# Altium PCB CC1201EvalBoard.PcbDoc
Units mil, origin at the board's own origin, x right, y up, seen from the top; angles counter-clockwise.
Board outline 1280 x 1750 mil, 4 copper layers (Top Layer, Layer 2, Layer 3, Bottom Layer), stack 59.5 mil thick; 75 components, 54 nets, 249 pads, 61 vias.
Unrouted connection lines stored in the file: 68.
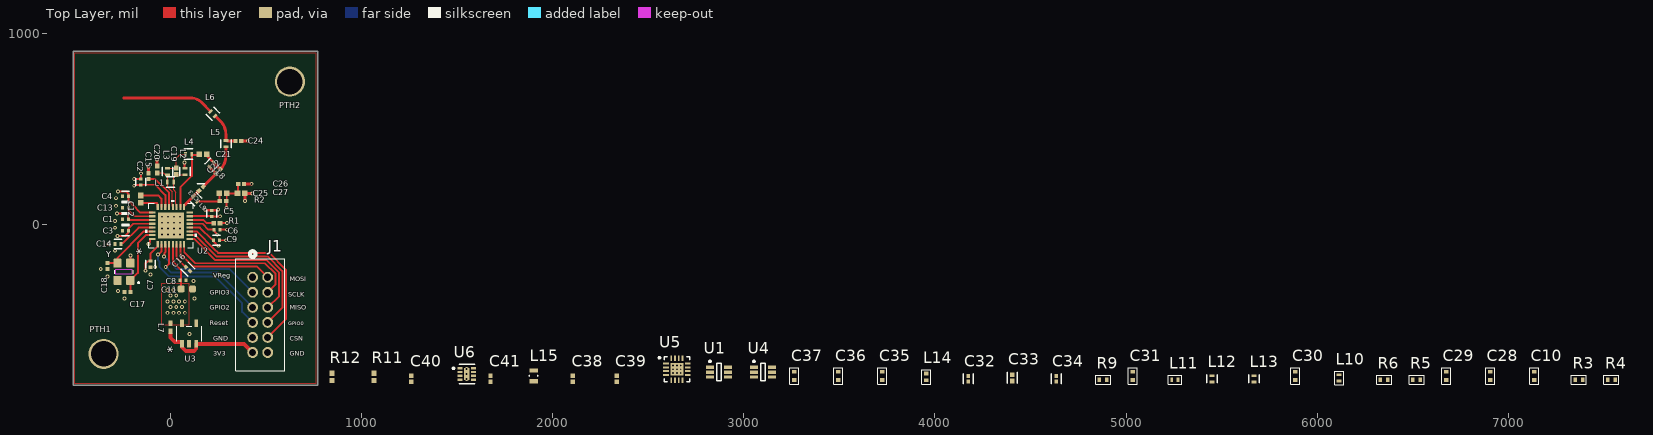
[diagram p0: Top Layer view]
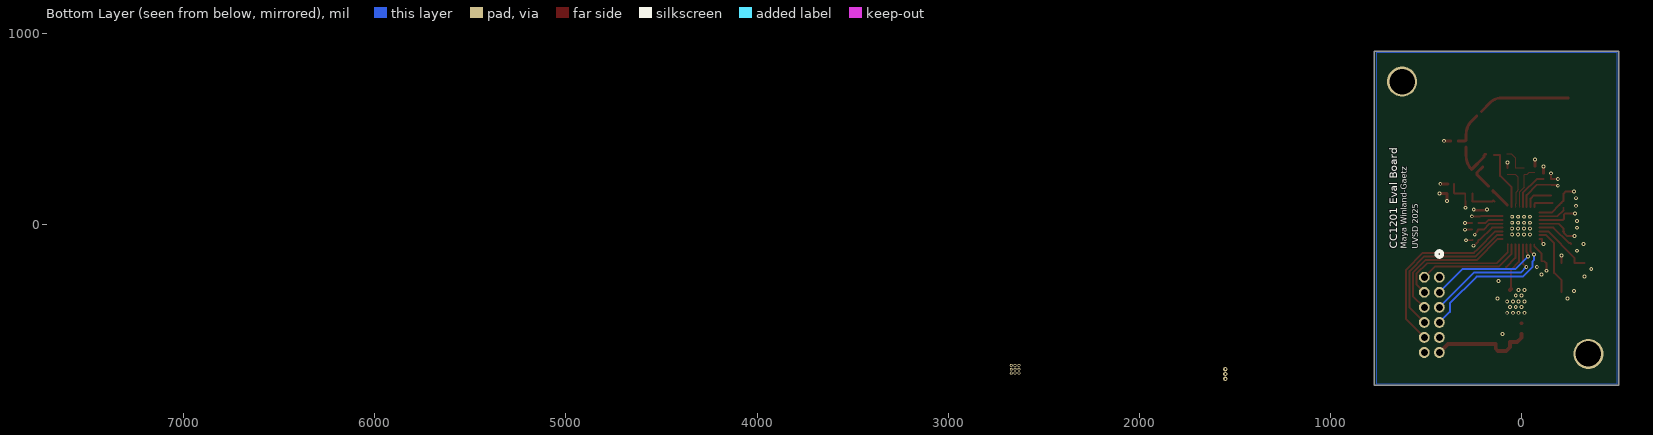
[diagram p1: Bottom Layer view, seen from below]
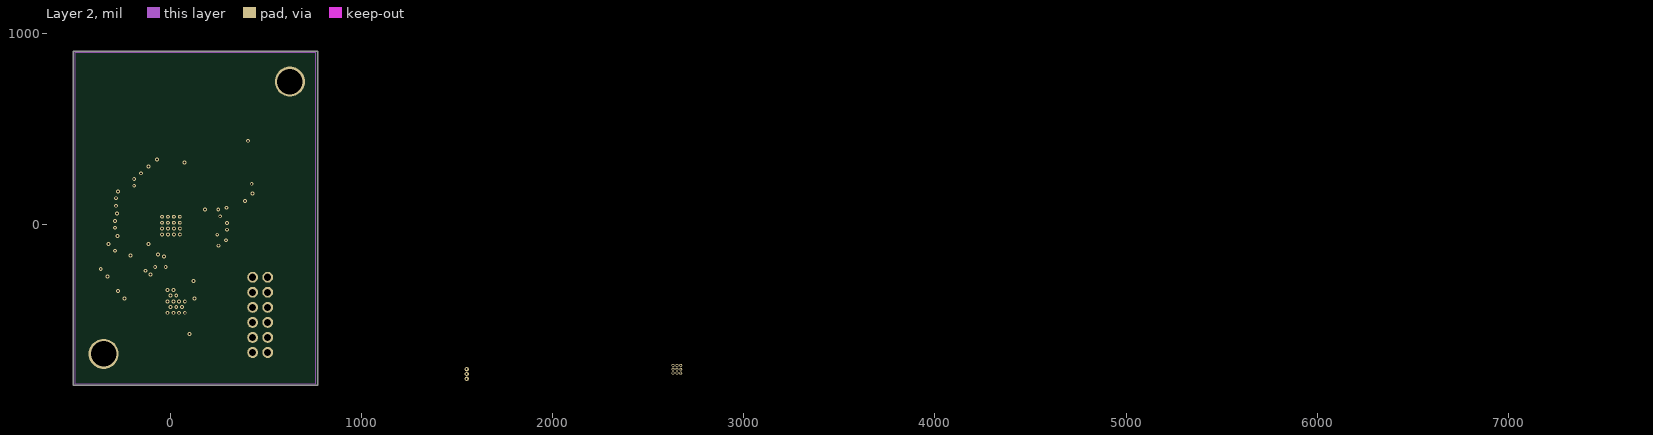
[diagram p2: Layer 2]
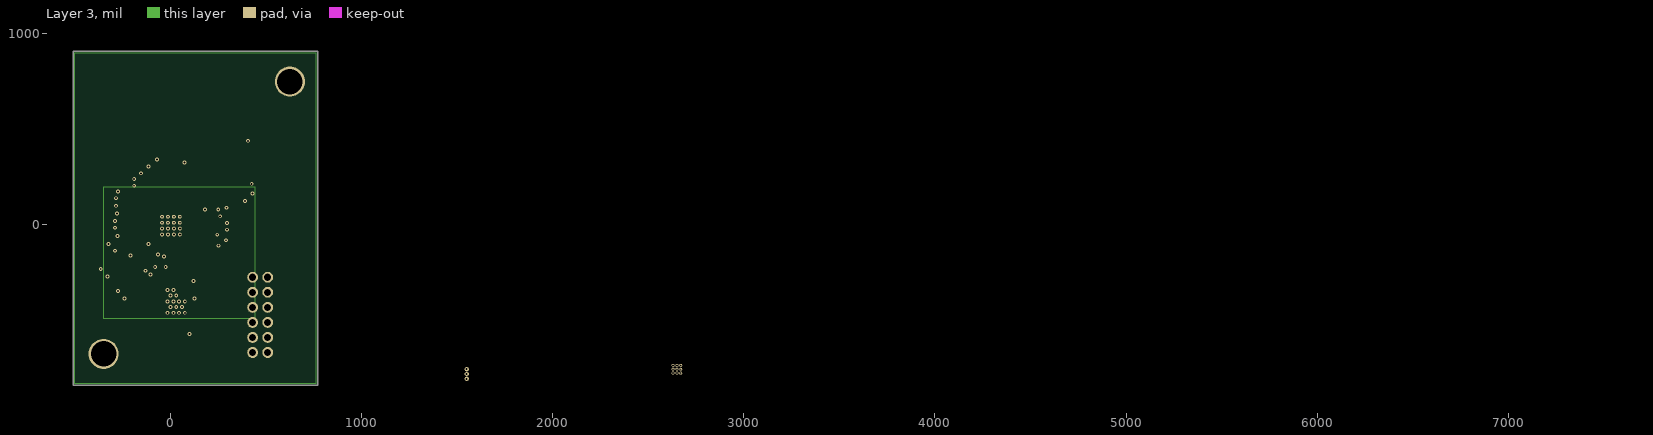
[diagram p3: Layer 3]

## Layer stack, top to bottom
Top Solder: solder mask 0.6, Solder Resist, Dk 3.5
Top Layer: signal copper 1.7
Dielectric 1: prepreg 7.87, FR-4, Dk 3.61
Layer 2: signal copper 0.68
Core: core 39, FR-4, Dk 3.61
Layer 3: signal copper 0.68
Dielectric 2: prepreg 7.87, FR-4, Dk 3.61
Bottom Layer: signal copper 1.7
Board Layer Stack Bottom Solder: solder mask 0.6, Solder Resist, Dk 3.5

## Board outline
-510,910 770,910 770,-840 -510,-840

## Design rules (kind name [scope] priority, off if disabled: settings)
AssemblyTestPointUsage [All] p1: isadvanced=TRUE
AssemblyTestpoint [All] p1: isadvanced=TRUE testpointundercomponent=TRUE minsize=40 maxsize=100 preferedsize=60 minholesize=0 maxholesize=40 preferedholesize=32 testpointgrid=1 usegrid=TRUE gridoriginx=3045 gridoriginy=3310 gridtolerance=0.01 allowsidetop=TRUE allowsidebottom=TRUE
BoardOutlineClearance [All] p1: gap=15 ignorepadtopadclearanceinfootprint=FALSE except(0: Poly-OutlineEdge Poly-CavityEdge Poly-CutoutEdge Poly-SplitBarrior Poly-SplitContinuation)
Clearance 80R_To_GND [InNetClass('80R') vs InPolygon] p1: gap=16 ignorepadtopadclearanceinfootprint=FALSE
Clearance 50R_To_GND [InNetClass('50R') vs InPolygon] p2: gap=25 ignorepadtopadclearanceinfootprint=FALSE except(15: SMDPad-Poly; 16: Arc-Arc Arc-Track Track-Track)
Clearance Clearance_1 [(ExistsOnLayer('Layer 2') Or ExistsOnLayer('Layer 3')) vs (ExistsOnLayer('Layer 2') Or ExistsOnLayer('Layer 3'))] p3: gap=7.87 ignorepadtopadclearanceinfootprint=FALSE sourcerule=54 cellrowname=All cellrowtype=0 cellcolname=All cellcoltype=0 innerlayers=TRUE
Clearance Clearance_2 [(ExistsOnLayer('Top Layer') Or ExistsOnLayer('Bottom Layer')) vs (ExistsOnLayer('Top Layer') Or ExistsOnLayer('Bottom Layer'))] p4: gap=7.87 ignorepadtopadclearanceinfootprint=FALSE sourcerule=54 cellrowname=All cellrowtype=0 cellcolname=All cellcoltype=0 outerlayers=TRUE
Clearance [All] p5: gap=10 ignorepadtopadclearanceinfootprint=FALSE ismatrix=TRUE
ComponentClearance [All] p1: isadvanced=TRUE gap=10 collisioncheckmode=3 verticalgap=10 showdistances=FALSE
FabricationTestPointUsage [All] p1: isadvanced=TRUE valid=0 allowmultiple=FALSE
FabricationTestpoint [All] p1: isadvanced=TRUE side=3 testpointundercomponent=TRUE minsize=40 maxsize=100 preferedsize=60 minholesize=0 maxholesize=40 preferedholesize=32 testpointgrid=1 allowsidetop=TRUE allowsidebottom=TRUE usegrid=TRUE gridoriginx=3045 gridoriginy=3310 gridtolerance=0.01
FanoutControl Fanout_BGA [IsBGA] p1: isadvanced=TRUE bgadir=Out bgaviamode=Centered fanoutstyle=Auto fanoutdirection=Alternating viagrid=1 // Fanout_BGA (Default Rule)
FanoutControl Fanout_LCC [IsLCC] p2: isadvanced=TRUE bgadir=Out bgaviamode=Centered fanoutstyle=Auto fanoutdirection=Alternating viagrid=1 // Fanout_LCC (Default Rule)
FanoutControl Fanout_SOIC [IsSOIC] p3: isadvanced=TRUE bgadir=Out bgaviamode=Centered fanoutstyle=Auto fanoutdirection=Alternating viagrid=1 // Fanout_SOIC (Default Rule)
FanoutControl Fanout_Small [(CompPinCount < 5)] p4: isadvanced=TRUE bgadir=Out bgaviamode=Centered fanoutstyle=Auto fanoutdirection=OutThenIn viagrid=1 // Fanout_Small (Default Rule)
FanoutControl Fanout_Default [All] p5: isadvanced=TRUE bgadir=Out bgaviamode=Centered fanoutstyle=Auto fanoutdirection=Alternating viagrid=1 // Fanout_Default (Default Rule)
Height [All] p1: isadvanced=TRUE minheight=0 maxheight=1000 prefheight=500
HoleSize [All] p1: isadvanced=TRUE absolutevalues=TRUE maxlimit=100 minlimit=1 maxpercent=80.000 minpercent=20.000
HoleToHoleClearance [All] p1: isadvanced=TRUE gap=0 allowstackedmicrovias=TRUE
LayerPairs [All] p1: isadvanced=TRUE enforce=TRUE
MaxMinImpedance MaxMinImpedance_1 [InNet('NetJ4_1')] p1: minimum=49.00 maximum=51.00
MinimumSolderMaskSliver [All] p1: isadvanced=TRUE minsoldermaskwidth=4
NetAntennae [All] p1: isadvanced=TRUE netantennaetolerance=0
PasteMaskExpansion [All] p1: isadvanced=TRUE expansion=0
PlaneClearance PlaneClearance_1 [All] p1: clearance=16
PlaneClearance [All] p2: isadvanced=TRUE clearance=20
PlaneConnect [All] p1: isadvanced=TRUE planeconnectstyle=Relief reliefexpansion=20 reliefentries=4 reliefconductorwidth=10 reliefairgap=10
PolygonConnect "CC1201 Stitching" [InNet('GND') vs (IsVia OR IsPad AND InComponent('U2'))] p1: connectstyle=Direct reliefconductorwidth=10 reliefentries=4 polygonreliefangle="90 Angle" airgapwidth=10
PolygonConnect "Via Stitchings" [(InNamedUnion('Via Stitchings'))] p2: connectstyle=Direct reliefconductorwidth=10 reliefentries=4 polygonreliefangle="90 Angle" airgapwidth=10
PolygonConnect "Power Plane Connections" [(OnLayer('Layer 3')) vs IsVia] p3: connectstyle=Direct reliefconductorwidth=10 reliefentries=4 polygonreliefangle="90 Angle" airgapwidth=10
PolygonConnect "Mounting Holes" [(InComponent('PTH1') OR InComponent('PTH2'))] p4: connectstyle=Direct reliefconductorwidth=10 reliefentries=4 polygonreliefangle="90 Angle" airgapwidth=10
PolygonConnect [All] p5: connectstyle=Relief reliefconductorwidth=10 reliefentries=4 polygonreliefangle="90 Angle" airgapwidth=10
RoutingCorners RF [(InNetClass('50R') OR InNetClass('80R'))] p1: cornerstyle=Round minsetback=100 maxsetback=100
RoutingCorners [All] p2: isadvanced=TRUE cornerstyle=45-Degree minsetback=100 maxsetback=100
RoutingPriority [All] p1: isadvanced=TRUE routingpriority=0
RoutingVias [All] p1: holewidth=28 width=50 viastyle="Through Hole" minholewidth=28 minwidth=50 maxholewidth=28 maxwidth=50
ShortCircuit [All] p1: isadvanced=TRUE allowed=FALSE
SilkToSilkClearance [All] p1: isadvanced=TRUE silktosilkclearance=10
SilkToSolderMaskClearance [IsPad] p1: isadvanced=TRUE minsilkscreentomaskgap=5 clearancetoexposedcopper=TRUE
SolderMaskExpansion [All] p1: isadvanced=TRUE expansion=4 istentingtop=FALSE
SupplyNets "Schematic Supply Nets_5" [InNet('GND')] p1: voltage=0.000
SupplyNets "Schematic Supply Nets_4" [InNet('3V3A')] p2: voltage=0.000
SupplyNets "Schematic Supply Nets_3" [InNet('VDD_REG')] p3: voltage=0.000
UnRoutedNet [All] p1: isadvanced=TRUE
UnpouredPolygon [All] p1: isadvanced=TRUE
Width "Schematic Width Constraint" [InNetClass('RF_Main_Line')] p1: maxlimit=15.05 minlimit=8.87 preferedwidth=15.05 toplayer_minwidth=15.05 midlayer1_maxwidth=8.87 midlayer1_prefwidth=8.87 midlayer2_maxwidth=8.87 midlayer2_prefwidth=8.87 bottomlayer_minwidth=15.05 impedanceprofiledriven=TRUE impedanceprofileid={50AE215A-F4A0-4E25-9E06-91FD44022372} impedanceprofilevalue=50.000000 minimp=50.000000 maximp=50.000000 favimp=50.000000
Width 50_Ohm [InNetClass('50R')] p2: maxlimit=15.05 minlimit=8.87 preferedwidth=15.05 toplayer_minwidth=15.05 midlayer1_maxwidth=8.87 midlayer1_prefwidth=8.87 midlayer2_maxwidth=8.87 midlayer2_prefwidth=8.87 bottomlayer_minwidth=15.05 impedanceprofiledriven=TRUE impedanceprofileid={50AE215A-F4A0-4E25-9E06-91FD44022372} impedanceprofilevalue=50.000000 minimp=50.000000 maximp=50.000000 favimp=50.000000
Width 80_Ohm [InNetClass('80R')] p3: maxlimit=5.17 minlimit=2 preferedwidth=5.17 toplayer_minwidth=5.17 midlayer1_maxwidth=2 midlayer1_prefwidth=2 midlayer2_maxwidth=2 midlayer2_prefwidth=2 bottomlayer_minwidth=5.17 impedanceprofiledriven=TRUE impedanceprofileid={4277FD1D-45B3-40C1-A296-8DB108E2D102} impedanceprofilevalue=80.000000 minimp=50.000000 maximp=50.000000 favimp=50.000000
Width VDD [InNetClass('VDD')] p4: maxlimit=20.2 minlimit=10 preferedwidth=10 minimp=50.000000 maximp=50.000000 favimp=50.000000
Width MaxMinWidth_4 [InNetClass('ZMatch')] p5: maxlimit=15.05 minlimit=8.87 preferedwidth=15.05 toplayer_minwidth=15.05 midlayer1_maxwidth=8.87 midlayer1_prefwidth=8.87 midlayer2_maxwidth=8.87 midlayer2_prefwidth=8.87 bottomlayer_minwidth=15.05 impedanceprofiledriven=TRUE impedanceprofileid={50AE215A-F4A0-4E25-9E06-91FD44022372} impedanceprofilevalue=50.000000 minimp=50.000000 maximp=50.000000 favimp=50.000000
Width [All] p6: maxlimit=10 minlimit=10 preferedwidth=10
4 further rules are at their usual default settings.

## Classes and differential pairs
net class RF_Main_Line: GND NetC30_1 NetC30_2 NetC31_1 NetC31_2 NetC33_1 NetC34_1 NetC35_1 NetC37_1
net class VDD: 3V3A NetU3_4 VDD_REG
net class 80R: LNA_N LNA_P NetC19_1
net class 50R: NetC10_1 NetC21_2 NetC22_1 NetC24_2 NetC37_1 NetC40_1 NetC40_2 NetC41_2 PA RF_TxRx

## Components (designator, comment, footprint, x,y, rotation, side; value= is the part's Value field where it differs from the comment)
C1 "GRM155R71E473KA88D" FP-GRM155-0_05-MFG -235,30 r180 top
C2 "GRM155R71E473KA88D" FP-GRM155-0_05-MFG -155,225 r90 top
C3 "GRM155R71E473KA88D" FP-GRM155-0_05-MFG -235,-30 r180 top
C4 "GRM155R71E473KA88D" FP-GRM155-0_05-MFG -235,150 r180 top
C5 "GRM155R71E473KA88D" FP-GRM155-0_05-MFG 216,61 r90 top
C6 "GRM155R71E473KA88D" FP-GRM155-0_05-MFG 244.25,-25 r0 top
C7 "GRM155R71E473KA88D" FP-GRM155-0_05-MFG -105,-205.75 r270 top
C8 "GRM155R71E473KA88D" FP-GRM155-0_05-MFG 65,-290 r0 top
C9 "GRM155R71E473KA88D" FP-GRM155-0_05-MFG 240,-80 r0 top
C10 "GRM155R71C104KA88D" MURATA_C0402 7135,-790 r90 top value=0.10μF
C11 "GRT188R61A225KE13D" CAPC1608X9N 85.47,-335 r0 top
C12 "GRM1557U1A152JA01D" CAPC1005X55X25ML05T10 -155,135 r270 top
C13 "GRM155R71E473KA88D" FP-GRM155-0_05-MFG -235,90 r180 top
C14 "GRM155R71E473KA88D" FP-GRM155-0_05-MFG -275,-100 r180 top
C15 "GRM155R71E103KA01D" CAPC1005X55X25LL05T10 -115,255 r270 top
C16 "GRM155R61A224KE19D" FP-GRM155-0_05-IPC_C 91.08,-231.08 r315 top
C17 "GRM1555C1H150JA01D" CAPC1005X55X25LL05T10 -225,-350 r0 top
C18 "GRM1555C1H150JA01D" CAPC1005X55X25LL05T10 -330,-214.65 r90 top
C19 "GRM1555C1H3R3CA01D" CAPC1005X55X25NL5T10 30,280 r270 top
C20 "GRM1555C1H3R3CA01D" CAPC1005X55X25NL5T10 -70,290 r270 top
C21 "GRM1555C1H2R2CA01D" CAPC1005X55X25ML05T10 170,370 r0 top value=2.2p
C22 "GRM1555C1H1R0BA01D" CAPC1005X55X25LL05T10 250,280 r45 top
C23 "GRM1555C1H150JA01D" CAPC1005X55X25LL05T10 160,190 r45 top
C24 "GRM1555C1H3R0CA01D" CAPC1005X55X25LL05T10 355,440 r180 top value=3pF
C25 "GRM1555C1H330JA01D" CAPC1005X55X25ML05T10 275,165 r180 top
C26 "GRM155R71E103KA01D" CAPC1005X55X25LL05T10 370,215 r180 top
C27 "GRM1555C1H101JA01D" CAPC1005X55X25ML05T10 370,165 r180 top
C28 "GRM155R71C104KA88D" MURATA_C0402 6905,-790 r90 top value=0.10μF
C29 "GRM1555C1H101JA01D" MURATA_C0402 6675,-790 r90 top
C30 "GRM1555C1H101JA01D" MURATA_C0402 5885,-790 r90 top
C31 "GRM155R70G105KA12D" MURATA_C0402 5035,-790 r90 top
C32 "GJM1555C1H3R9CB01D" FP-GJM155-0_05-IPC_C 4175,-805 r90 top
C33 "GJM1555C1H6R8WB01D" FP-GJM155-0_05-IPC_B 4405,-800 r90 top
C34 "GJM1555C1H3R9CB01D" FP-GJM155-0_05-IPC_C 4635,-805 r90 top
C35 "GJM1555C1HR30WB01D" MURATA_C0402 3725,-790 r90 top
C36 "GJM1555C1H4R7CB01D" MURATA_C0402 3495,-790 r90 top
C37 "GJM1555C1H1R5BB01D" MURATA_C0402 3265,-790 r90 top
C38 "1uF" CAPC1005X56X25LL10T15 2105,-805 r90 top
C39 "100pF" CAPC1005X56X25LL10T15 2335,-805 r90 top
C40 "4.7pF" CAPC1005X56X25LL10T15 1260,-805 r90 top
C41 "100pF" CAPC1005X56X25LL10T15 1675,-805 r90 top
J1 "PPTC062LFBN-RC" CONN12_878311241_MOL 430,-273.78 r270 top
L1 "LQW15AN15NJ00D" FP-LQW15AN_00-W0_6-0_1-MFG#1 0,225 r180 top
L2 "LQW15AN12NJ00D" FP-LQW15AN_00-W0_6-0_1-MFG#1 75,280 r270 top value=12nH
L3 "LQW15AN12NJ00D" FP-LQW15AN_00-W0_6-0_1-MFG#1 -15,280 r90 top value=12nH
L4 "LQW15AN12NJ00D" FP-LQW15AN_00-W0_6-0_1-MFG#1 95,370 r180 top value=12nH
L5 "LQW15AN18NJ00D" FP-LQW15AN_00-W0_6-0_1-MFG#1 290,425 r90 top
L6 "LQW15AN12NJ00D" FP-LQW15AN_00-W0_6-0_1-MFG#1 222,582 r135 top value=12nH
L7 "BLM15HG102SN1D" "IND_BLM15_0402_MUR - NO_KEEPOUT" 0,-535 r270 top
L8 "LQW15AN7N5G00D" FP-LQW15AN_00-W0_6-0_1-MFG#1 215,315 r45 top
L9 "LQW15AN10NJ00D" FP-LQW15AN_00-W0_6-0_1-MFG#1 130,135 r135 top
L10 "LQW15AN18NJ00D" MURATA_L0402_LQW 6115,-800 r90 top
L11 "LQW15AN3N6C10D" MURATA_L0402_LQW 5255,-810 r0 top
L12 "LQW15AN12NG00D" FP-LQW15AN_00-W0_6-0_1-MFG#2 5450,-805 r90 top
L13 "LQW15AN12NG00D" FP-LQW15AN_00-W0_6-0_1-MFG#2 5670,-805 r90 top
L14 "LQP15MN8N2B02D" MURATA_L0402_LQP 3955,-795 r90 top
L15 "12nH" FP-LQW18AN_80-MFG 1900,-790 r90 top
PTH1 "PTH" "M3 Mounting Hole" -350,-675 r0 top
PTH2 "PTH" "M3 Mounting Hole" 625,750 r0 top
R1 "RK73H1ETTP5602F" RESC1005X40X25NL10T10 243.27,10 r0 top
R2 "RC0402JR-0710RL" RESC1005X40X25NL05T10 275,125 r180 top
R3 "RC0402FR-07300RL" Yageo_0402 7370,-810 r0 top
R4 "RC0402JR-130RL" Yageo_0402 7540,-810 r0 top
R5 "RC0402FR-07130RL" Yageo_0402 6520,-810 r0 top
R6 "AC0402FR-07820RL" Yageo_0402 6350,-810 r0 top
R9 "RC0402FR-077R5L" Yageo_0402 4880,-810 r0 top
R11 "33k" RESC1005X40X25ML05T10 1065,-795 r90 top
R12 "10k" RESC1005X40X25ML05T10 845,-795 r90 top
U1 "4259-63" PERE-SC-70-6_M 2870,-770 r0 top
U2 "CC1201RHBR" RHB32_3P45X3P45_TEX 2.44,-3.91 r90 top
U3 "TPS79330DBVR" DBV5_TEX 97.6,-568.75 r90 top
U4 "4259-63" PERE-SC-70-6_M 3100,-770 r0 top
U5 "GRF5511" QFN50P300X300X100_HS-17N 2650,-755 r0 top
U6 "TQP3M9036" FP-TQP3M9036-MFG 1550,-780 r0 top
Y "NX3225SA-40M-EXS00A-CS03880" OSCCC320X250X60 -243.46,-245.28 r180 top

## Footprints (in the part's own frame and the unit in brackets; to place one, negate y for a bottom-side part, rotate by r counter-clockwise, add the part's x,y. Pads: shape width x height; smd on the part's side, far side on the other; paste and mask are expansions set on the pad)
CAPC1005X55X25LL05T10 [mm] "Chip Capacitor, 2-Leads, Body 1.00x0.50mm, IPC High Density"
  rect 0.56x0.52 smd mask+0.025: 1(-0.39,0) 2(0.39,0)
  body extent -0.53,-0.28 0.53,0.28, height 0.55
CAPC1005X55X25ML05T10 [mm] "Chip Capacitor, 2-Leads, Body 1.00x0.50mm, IPC Low Density"
  rect 0.76x0.72 smd mask+0.025: 1(-0.49,0) 2(0.49,0)
  body extent -0.53,-0.28 0.53,0.27, height 0.55
CAPC1005X55X25NL5T10 [mm] "Chip Capacitor, 2-Leads, Body 1.05x0.55mm, IPC Medium Density"
  rect 0.66x0.62 smd mask+0.025: 1(-0.44,0) 2(0.44,0)
  body extent -0.53,-0.28 0.53,0.28, height 0.55
CAPC1005X56X25LL10T15 [mm] "Chip Capacitor, 2-Leads, Body 1.00x0.50mm, IPC High Density"
  rect 0.58x0.54 smd: 1(-0.39,0) 2(0.39,0)
  body extent -0.55,-0.3 0.55,0.3, height 0.56
CAPC1608X9N [mm]
  rrect50% 0.93x0.93 smd mask+0.025: 1(-0.75,0) 2(0.75,0)
CONN12_878311241_MOL [mil]
  round 57 hole 37 paste-99999 mask+1: 1(0,0) 2(0,78.74) 3(78.74,0) 4(78.74,78.74) 5(157.48,0) 6(157.48,78.74) 7(236.22,0) 8(236.22,78.74) 9(314.96,0) 10(314.96,78.74) 11(393.7,0) 12(393.7,78.74)
  silkscreen extent -137,-90 490,168
DBV5_TEX [mil]
  rect 38.5x20 smd paste+0 mask+1: 1(-53.75,37.4) 2(-53.75,0) 3(-53.75,-37.4) 4(53.75,-37.4) 5(53.75,37.4)
  silkscreen extent -40,-65 40,65, body extent -59,-60 59,60, height 57
FP-GJM155-0_05-IPC_B [mil]
  rect 24.23x22.54 smd paste+0 mask+0: 1(-16.87,0) 2(16.87,0)
  silkscreen extent -29,-27 29,27, body extent -35,-17 35,17, height 10
FP-GJM155-0_05-IPC_C [mil]
  rect 20.29x18.6 smd paste+0 mask+0: 1(-14.9,0) 2(14.9,0)
  silkscreen extent -25,-27 25,27, body extent -29,-15 29,15, height 10
FP-GRM155-0_05-IPC_C [mil]
  rect 20.29x18.6 smd paste+0 mask+1: 1(-14.9,0) 2(14.9,0)
  silkscreen extent -25,-27 25,27, body extent -29,-15 29,15, height 10
FP-GRM155-0_05-MFG [mm]
  rect 0.4x0.5 smd paste+0 mask+0.025: 1(-0.4,0) 2(0.4,0)
  silkscreen extent -0.5,-0.65 0.5,0.65, body extent -0.7,-0.38 0.7,0.38, height 0.25
FP-LQW15AN_00-W0_6-0_1-MFG#1 [mm]
  rect 0.35x0.65 smd paste+0 mask+0.025: 1(-0.425,0) 2(0.425,0)
  silkscreen extent -0.55,-0.7 0.55,0.7, body extent -0.7,-0.45 0.7,0.45, height 0.25
FP-LQW15AN_00-W0_6-0_1-MFG#2 [mm]
  rect 0.35x0.65 smd paste+0 mask+0: 1(-0.425,0) 2(0.425,0)
  silkscreen extent -0.55,-0.7 0.55,0.7, body extent -0.7,-0.45 0.7,0.45, height 0.25
FP-LQW18AN_80-MFG [mm]
  rect 0.57x1.15 smd paste+0 mask+0: 1(-0.715,0) 2(0.715,0)
  silkscreen extent -0.06,-0.55 0.06,0.55, body extent -1.1,-0.67 1.1,0.67, height 0.25
FP-TQP3M9036-MFG [mm]
  rect 0.67x0.3 smd paste+0 mask+0: 1(-0.885,0.75) 2(-0.885,0.25) 3(-0.885,-0.25) 4(-0.885,-0.75) 5(0.885,-0.75) 6(0.885,-0.25) 7(0.885,0.25) 8(0.885,0.75)
  rect 0.7x1.6 smd paste+0 mask+0: 9(0,0)
  silkscreen extent -1.87,-1.3 1.05,1.3, body extent -1.32,-1.12 1.32,1.12, height 0.25
"IND_BLM15_0402_MUR - NO_KEEPOUT" [mil]
  rect 28x22 smd paste+0 mask+1: 1(-20.5,0) 2(20.5,0)
  body extent -21,-11 21,11, height 22
"M3 Mounting Hole" [mm]
  round 4 hole 3.4: 1(0,0)
MURATA_C0402 [mm] "Murata mid-voltage MLCC 0402 footprint, medium density courtyard, origin at centre. Series GRM, GJM /  / Datasheet: (GRM1555C1H101JA01) https://search.murata.co.jp/Ceramy/image/img/A01X/G101/ENG/GRM1555C1H101JA01-01A.pdf"
  rect 0.5x0.6 smd: 1(-0.55,0) 2(0.55,0)
  silkscreen extent -1.1,-0.6 1.1,0.6, body extent -0.5,-0.25 0.5,0.25, height 0.56
MURATA_L0402_LQP [mm] "Murata mid-voltage inductor 0402 footprint, medium density courtyard, origin at centre. Series LQW /  / Datasheet: https://search.murata.co.jp/Ceramy/image/img/P02/JELF243A-0050.pdf"
  rect 0.5x0.6 smd: 1(-0.45,0) 2(0.45,0)
  silkscreen extent -0.97,-0.6 0.98,0.6, body extent -0.55,-0.31 0.55,0.31, height 0.46
MURATA_L0402_LQW [mm] "Murata mid-voltage inductor 0402 footprint, medium density courtyard, origin at centre. Series LQW /  / Datasheet: https://search.murata.co.jp/Ceramy/image/img/P02/JELF243A-0050.pdf"
  rect 0.35x0.65 smd: 1(-0.425,0) 2(0.425,0)
  silkscreen extent -0.9,-0.6 0.9,0.6, body extent -0.5,-0.3 0.5,0.3, height 0.6
OSCCC320X250X60 [mm]
  rrect25% 1.11x1.21 smd mask+0.025: 1(-0.85,1.15) 2(-0.85,-1.15) 3(0.85,-1.15) 4(0.85,1.15)
  silkscreen extent -2.05,-0.23 1.25,1.55
PERE-SC-70-6_M [mm] "SOT23, 6-Leads, Body 2.25x1.35mm, Pitch 0.65mm, IPC Low Density"
  rect 1.05x0.45 smd: 1(-1.2,0.65) 2(-1.2,0) 3(-1.2,-0.65) 4(1.2,-0.65) 5(1.2,0) 6(1.2,0.65)
  silkscreen extent -1.32,-1.15 0.3,1.55, body extent -0.67,-1.12 0.67,1.13, height 1.1
QFN50P300X300X100_HS-17N [mm]
  rect 0.75x0.25 smd: 1(-1.45,0.75) 2(-1.45,0.25) 3(-1.45,-0.25) 4(-1.45,-0.75) 9(1.45,-0.75) 10(1.45,-0.25) 11(1.45,0.25) 12(1.45,0.75)
  rect 0.25x0.75 smd: 5(-0.75,-1.45) 6(-0.25,-1.45) 7(0.25,-1.45) 8(0.75,-1.45) 13(0.75,1.45) 14(0.25,1.45) 15(-0.25,1.45) 16(-0.75,1.45)
  round 0.4 hole 0.256: 17(-0.508,-0.508) 17(-0.508,0) 17(-0.508,0.508) 17(0,-0.508) 17(0,0) 17(0,0.508) 17(0.508,-0.508) 17(0.508,0) 17(0.508,0.508)
  rect 1.7x1.7 smd: 17(0,0)
  silkscreen extent -2.45,-1.68 1.68,1.68, body extent -1.53,-1.53 1.53,1.53, height 1
RESC1005X40X25ML05T10 [mm] "Chip Resistor, 2-Leads, Body 1.00x0.50mm, IPC Low Density"
  rect 0.7x0.65 smd: 1(-0.475,0) 2(0.475,0)
  body extent -0.53,-0.27 0.53,0.28, height 0.4
RESC1005X40X25NL05T10 [mm] "Chip Resistor, 2-Leads, Body 1.00x0.50mm, IPC Medium Density"
  rect 0.6x0.55 smd mask+0.025: 1(-0.425,0) 2(0.425,0)
  body extent -0.53,-0.27 0.53,0.28, height 0.4
RESC1005X40X25NL10T10 [mm] "Chip Resistor, 2-Leads, Body 1.00x0.50mm, IPC Medium Density"
  rect 0.65x0.6 smd mask+0.025: 1(-0.425,0) 2(0.425,0)
  body extent -0.55,-0.3 0.55,0.3, height 0.4
RHB32_3P45X3P45_TEX [mil]
  rect 33.46x11.02 smd paste-16.23 mask+1: 1(-97.44,68.9) 2(-97.44,49.21) 3(-97.44,29.53) 4(-97.44,9.84) 5(-97.44,-9.84) 6(-97.44,-29.53) 7(-97.44,-49.21) 8(-97.44,-68.9) 17(97.44,-68.9) 18(97.44,-49.21) 19(97.44,-29.53) 20(97.44,-9.84) 21(97.44,9.84) 22(97.44,29.53) 23(97.44,49.21) 24(97.44,68.9)
  rect 11.02x33.46 smd paste-16.23 mask+1: 9(-68.91,-97.44) 10(-49.22,-97.44) 11(-29.53,-97.44) 12(-9.85,-97.44) 13(9.84,-97.44) 14(29.53,-97.44) 15(49.22,-97.44) 16(68.91,-97.44) 25(68.91,97.44) 26(49.22,97.44) 27(29.53,97.44) 28(9.84,97.44) 29(-9.85,97.44) 30(-29.53,97.44) 31(-49.22,97.44) 32(-68.91,97.44)
  rect 135.83x135.83 smd paste-67.41 mask+1: 33(0,0)
  round 20 hole 10 paste-99999 mask+1: V(-46.5,-46.5) V(-46.5,-15.5) V(-46.5,15.5) V(-46.5,46.5) V(-15.5,46.5) V(-15.5,15.5) V(-15.5,-15.5) V(-15.5,-46.5) V(15.5,46.5) V(15.5,15.5) V(15.5,-15.5) V(15.5,-46.5) V(46.5,-46.5) V(46.5,-15.5) V(46.5,15.5) V(46.5,46.5)
  silkscreen extent -116,-134 134,134, body extent -103,-103 103,103, height 55
Yageo_0402 [mm] "Standard 0402 footprint for Yageo Resistors, medium density courtyard, origin at centre of component. Dimensions from Chip Resistor Surface Mount doc from Yageo, found at https://www.yageo.com/upload/website/yageo_PYu-R_Mount_10_19050818_343.pdf"
  rect 0.5x0.6 smd: 1(-0.5,0) 2(0.5,0)
  silkscreen extent -1,-0.6 1,0.6, body extent -0.5,-0.25 0.5,0.25, height 0.41

## Part data
C1 C2 C3 C4 C5 C6 C7 C8 C9 C13 C14: library part CMP-2008-04630-5, "Chip Multilayer Ceramic Capacitors for General Purpose, 0402, 47000pF, X7R, 15%, 10%, 25V", Capacitance=47nF, Case Code (Imperial)=0402, Case Code (Metric)=1005, Dielectric=X7R, Max Operating Temperature=125°C, Min Operating Temperature=-55°C, Package Quantity=1, Tolerance=10%, Voltage=25V, Case/Package=0402, Depth=0.5mm, Height=0.5mm, Lead Free="Lead Free", Length=1mm, Material=Ceramic, Mount="Surface Mount", Number of Pins=2, Packaging="Tape and Reel", Radiation Hardening=No, REACH SVHC="No SVHC", Termination=SMD/SMT, Thickness=0.022inch, Voltage Rating=25V, Voltage Rating (DC)=25V, Width=0.02inch
C10 C28: library part CMP-2100-03641-2, "CAP CER 0.1UF 16V X7R 0402", Capacitance=0.10μF, Manufacturer=Murata, Package=GRM15, Temperature="-55°C to +125°C", Temperature Characteristic=X7R, Temperature Range High=+125°C, Temperature Range Low=-55°C, Tolerance=10%, Voltage Rating=16Vdc, Category=Cap, ComponentLink2Description=Datasheet, ComponentLink2URL=https://search.murata.co.jp/Ceramy/image/img/A01X/G101/ENG/GRM155R71H471KA01-01A.pdf, Device Class L1="Passive Components", Device Class L2=Capacitors, Device Class L3="Ceramic Capacitors", Digikey Description="CAP CER 0.1UF 16V X7R 0402", Height=0.55mm, Ipc Land Pattern Name=CAPC10050X219, Lead Free=yes, Manufacturer Part Number=GRM155R71C104KA88D, Material=Ceramic, Mouser Description="0402 0.1 uF 16V ±10 % Tolerance X7R SMT Multilayer Ceramic Capacitor", Octopart=https://octopart.com/grm155r71c104ka88d-murata-196880, RoHS=TRUE, Standoff Height=0mm
C11: "CAP CER 2.2UF 10V X5R 0603", Package=None, Availability=Unavailable, MP=GRT188R61A225KE13D, Price=None
C12: library part CMP-2008-04484-1, Manufacturer=Murata, Part Number=GRM1557U1A152JA01D
C15 C26: library part CMP-1034-01880-2, Manufacturer=Murata, Part Number=GRM155R71E103KA01D
C16: library part CMP-2008-04561-5, "CAP CER 0.22UF 10V X5R 0402", Capacitance=220nF, Case Code (Imperial)=0402, Case Code (Metric)=1005, Dielectric=X5R, Dielectric Material=Ceramic, Insulation Resistance=10GR, Max Operating Temperature=85°C, Min Operating Temperature=-55°C, Package Quantity=1, Tolerance=10%, Voltage=10V, Case/Package=0402, Depth=0.5mm, Height=0.5mm, Lead Free="Lead Free", Length=1mm, Material=Ceramic, Mount="Surface Mount", Number of Pins=2, Packaging="Tape and Reel", Radiation Hardening=No, REACH SVHC="No SVHC", RoHS Compliant=Yes, Series=GRM, Termination=SMD/SMT, Thickness=0.022inch, Voltage Rating=10V, Voltage Rating (DC)=10V, Width=0.5mm
C17 C18 C23: library part CMP-2008-04266-1, Manufacturer=Murata, Part Number=GRM1555C1H150JA01D
C19 C20: library part CMP-1034-00264-3, "Chip Capacitor, 3.3 pF, +/- 0.25 pF, 50 V, -55 to 125 degC, 0402 (1005 Metric), RoHS, Tape and Reel", Capacitance="3.3 pF", Case Code (Imperial)=0402, Case Code (Metric)=1005, Max Operating Temperature="125 degC", Min Operating Temperature="-55 degC", Package Quantity=10000, Type (Capacitors)=C0G, Voltage Rating="50 V", Case/Package=0402, ComponentLink1Description="Manufacturer URL", ComponentLink1URL=http://www.murata.com/, ComponentLink2Description=Datasheet, ComponentLink2URL=http://search.murata.co.jp/Ceramy/image/img/A01X/G101/ENG/GRM1555C1H3R3CA01-01.pdf, DatasheetVersion=03/2016, Height="0.5 mm", Length="0.039 inch", Mount="Surface Mount", Mounting Technology="Surface Mount", PackageDescription="2-Pin Surface Mount Device, Body 1 x 0.5 mm", Packaging="Tape and Reel", PartNumber=GRM1555C1H3R3CA01D, Radiation Hardening=No, REACH SVHC="No SVHC", RoHSCompliant=true, Voltage Rating (DC)="50 V", Width="0.02 inch"
C21: library part CMP-2008-03920-1, Manufacturer=Murata, Part Number=GRM1555C1H2R2CA01D
C22: library part CMP-2008-03925-1, Manufacturer=Murata, Part Number=GRM1555C1H1R0BA01D
C24: library part CMP-2008-04347-1, Manufacturer=Murata, Part Number=GRM1555C1H3R0CA01D
C25: library part CMP-2008-03913-1, Manufacturer=Murata, Part Number=GRM1555C1H330JA01D
C27 C29 C30: library part CMP-2008-03915-1, Manufacturer=Murata, Part Number=GRM1555C1H101JA01D
C31: library part CMP-2008-04585-2, "Chip Multilayer Ceramic Capacitors for General Purpose, 0402, 1.0uF, X7R, 15%, 10%, 4V", Capacitance=1uF, Case Code (Imperial)=0402, Case Code (Metric)=1005, Dielectric=X7R, Max Operating Temperature=125°C, Min Operating Temperature=-55°C, Package Quantity=10000, Resistor Type=Ceramic, Tolerance=10%, Voltage=4V, Case/Package=0402, Depth=0.5mm, Height=0.5mm, Lead Free="Lead Free", Length=1mm, Mount="Surface Mount", Packaging="Tape and Reel", REACH SVHC="No SVHC", Termination=SMD/SMT, Thickness=0.022inch, Voltage Rating=4V, Voltage Rating (DC)=4V, Weight=0.000212oz, Width=0.02inch
C32 C34: library part CMP-2008-03853-2, "Multi-Layer Ceramic Capacitor 3.9pF C0G  ±0.25pF 0402 Paper T/R", Capacitance=3.9pF, Case Code (Imperial)=0402, Case Code (Metric)=1005, Dielectric=C0G, Max Operating Temperature=125°C, Min Operating Temperature=-55°C, Package Quantity=1, Voltage=50V, Case/Package=0402, Depth=0.5mm, Height=0.5mm, Lead Free="Lead Free", Length=1mm, Mount="Surface Mount", Packaging="Tape and Reel", Radiation Hardening=No, Termination=SMD/SMT, Thickness=0.022inch, Voltage Rating=50V, Voltage Rating (DC)=50V, Width=0.02inch
C33: library part CMP-06035-049612-1, "Multi-Layer Ceramic Capacitor 6.8pF C0G  ±0.05pF 0402 Paper T/R", Capacitance=6.8pF, Dielectric=C0G, Voltage Rating (DC)=50V, Length=1mm, Thickness=500um, Width=500um
C35: library part CMP-2008-03901-2, "Multi-Layer Ceramic Capacitor 0.3pF C0G  ±0.05pF 0402 Paper T/R", Capacitance=0.3pF, Case Code (Imperial)=0402, Case Code (Metric)=1005, Dielectric=C0G, Max Operating Temperature=125°C, Min Operating Temperature=-55°C, Package Quantity=10000, Voltage Rating=50V, Case/Package=0402, Depth=0.5mm, Height=0.5mm, Lead Free="Lead Free", Length=1mm, Mount="Surface Mount", Packaging="Tape and Reel", Radiation Hardening=No, Termination=SMD/SMT, Thickness=0.022inch, Voltage Rating (DC)=50V, Width=0.02inch
C36: library part CMP-2008-03859-2, "Multi-Layer Ceramic Capacitor 4.7pF C0G  ±0.25pF 0402 Paper T/R", Capacitance=4.7pF, Case Code (Imperial)=0402, Case Code (Metric)=1005, Dielectric=C0G, Max Operating Temperature=125°C, Min Operating Temperature=-55°C, Package Quantity=10000, Temperature Coefficient=30ppm/°C, Voltage=50V, Case/Package=0402, Depth=0.5mm, Height=0.5mm, Lead Free="Lead Free", Lead Pitch=0.3mm, Length=1mm, Mount="Surface Mount", Number of Pins=2, Packaging="Tape and Reel", Radiation Hardening=No, REACH SVHC="No SVHC", Termination=SMD/SMT, Thickness=0.022inch, Voltage Rating=50V, Voltage Rating (DC)=50V, Width=0.02inch
C37: library part CMP-2008-03820-2, "Multi-Layer Ceramic Capacitor 1.5pF C0G  ±0.1pF 0402 Paper T/R", Capacitance=1.5pF, Case Code (Imperial)=0402, Case Code (Metric)=1005, Dielectric=C0G, Max Operating Temperature=125°C, Min Operating Temperature=-55°C, Package Quantity=10000, Temperature Coefficient=30ppm/°C, Voltage=50V, Case/Package=0402, Construction=Flat, Depth=0.5mm, Height=0.5mm, Lead Free="Lead Free", Lead Pitch=0.3mm, Length=1mm, Mount="Surface Mount", Number of Pins=2, Packaging="Tape and Reel", Radiation Hardening=No, REACH SVHC="No SVHC", Series=GJM, Termination=SMD/SMT, Thickness=0.022inch, Voltage Rating=50V, Voltage Rating (DC)=50V, Width=0.5mm
C38 C39 C40 C41: library part CMP-2008-02462-1, Manufacturer="AVX Interconnect / Elco", Part Number=04023A101FAT2A
L1: library part CMP-2000-06595-2, "Wire Wound RF Inductor 15nH ±5% 460mA 0.16Ω 0402 (1005)", Case Code (Imperial)=0402, Case Code (Metric)=1005, Current Rating=460mA, DC Resistance (DCR)=160mR, Inductance=15nH, Max Operating Temperature=125°C, Min Operating Temperature=-55°C, Package Quantity=10000, Resistor Type=Wirewound, Self Resonant Frequency=5GHz, Test Frequency=100MHz, Tolerance=5%, Case/Package=0402, Core Material=Air, DC Current=460mA, Depth=0.7mm, Height=0.5mm, Lead Free="Lead Free", Length=1mm, Max DC Current=460mA, Military Standard=Not, Mount="Surface Mount", Packaging="Tape and Reel", Q Factor=30, Radiation Hardening=No, Shielding=Unshielded, Termination=SMD/SMT, Weight=2.8E-05oz, Width=0.02inch
L2 L3 L4 L6: library part CMP-06042-005424-1, "Wire Wound RF Inductor 12nH ±5% 500mA 0.14Ω 0402 (1005)", Case Code (Imperial)=0402, Case Code (Metric)=1005, Current Rating=500mA, DC Resistance (DCR)=140mR, Inductance=12nH, Max Operating Temperature=125°C, Min Operating Temperature=-55°C, Package Quantity=10000, Resistor Type=Wirewound, Self Resonant Frequency=5.5GHz, Test Frequency=100MHz, Tolerance=5%, Case/Package=0402, Core Material=Air, DC Current=500mA, Depth=0.7mm, Height=0.02inch, Lead Free="Lead Free", Length=1.1mm, Max DC Current=500mA, Military Standard=Not, Mount="Surface Mount", Packaging="Tape and Reel", Q Factor=30, Radiation Hardening=No, Shielding=Unshielded, Termination=SMD/SMT, Weight=2.8E-05oz, Width=0.5mm
L5 L10: library part CMP-06042-006916-1, "Wire Wound RF Inductor 18nH ±5% 370mA 0.27Ω 0402 (1005)", Case Code (Imperial)=0402, Case Code (Metric)=1005, Current Rating=370mA, DC Resistance (DCR)=270mR, Inductance=18nH, Max Operating Temperature=125°C, Min Operating Temperature=-55°C, Package Quantity=10000, Resistor Type=Wirewound, Self Resonant Frequency=4.5GHz, Test Frequency=100MHz, Tolerance=5%, Case/Package=0402, Core Material=Air, DC Current=370mA, Depth=0.7mm, Height=0.5mm, Lead Free="Lead Free", Length=1mm, Max DC Current=370mA, Military Standard=Not, Mount="Surface Mount", Packaging="Tape and Reel", Q Factor=25, Radiation Hardening=No, Shielding=Unshielded, Termination=SMD/SMT, Weight=2.8E-05oz, Width=0.02inch
L7: "No Description Available", Mfr_Name=Murata
L8: library part CMP-2000-06597-2, "Wire Wound RF Inductor 7.5nH ±2% 570mA 0.13Ω 0402 (1005)", Case Code (Imperial)=0402, Case Code (Metric)=1005, Current=540mA, Current Rating=570mA, DC Resistance (DCR)=130mR, Inductance=7.5nH, Inductance Tolerance=2%, Max Operating Temperature=125°C, Min Operating Temperature=-55°C, Package Quantity=10000, Resistor Type=Wirewound, Self Resonant Frequency=6GHz, Test Frequency=100MHz, Case/Package=0402, Core Material=Air, DC Current=570mA, Depth=0.7mm, Height=0.5mm, Lead Free="Lead Free", Length=1mm, Max DC Current=570mA, Military Standard=Not, Mount="Surface Mount", Number of Pins=2, Packaging="Tape and Reel", Q Factor=25, Radiation Hardening=No, REACH SVHC="No SVHC", Shielding=Unshielded, Termination=SMD/SMT, Tolerance=2%, Weight=2.8E-05oz, Width=0.02inch
L9: library part CMP-2000-06594-2, "Wire Wound RF Inductor 10nH ±5% 500mA 0.17Ω 0402 (1005)", Case Code (Imperial)=0402, Case Code (Metric)=1005, Current Rating=500mA, DC Resistance (DCR)=170mR, Inductance=10nH, Max Operating Temperature=125°C, Min Operating Temperature=-55°C, Package Quantity=10000, Resistor Type=Wirewound, Self Resonant Frequency=5.5GHz, Test Frequency=100MHz, Tolerance=5%, Case/Package=0402, Core Material=Air, DC Current=500mA, Depth=0.7mm, Height=0.5mm, Lead Free="Lead Free", Length=1mm, Max DC Current=500mA, Military Standard=Not, Mount="Surface Mount", Packaging="Tape and Reel", Q Factor=25, Radiation Hardening=No, Shielding=Unshielded, Termination=SMD/SMT, Weight=2.8E-05oz, Width=0.02inch
L11: library part CMP-06042-002461-1, "Wire Wound RF Inductor 3.6nH ±0.2nH 900mA 0.04Ω 0402 (1005)", Case Code (Imperial)=0402, Case Code (Metric)=1005, Current Rating=900mA, DC Resistance (DCR)=40mR, Inductance=3.6nH, Max Operating Temperature=125°C, Min Operating Temperature=-55°C, Package Quantity=10000, Self Resonant Frequency=9.5GHz, Test Frequency=100MHz, Case/Package=0402, Core Material=Air, DC Current=900mA, Depth=0.7mm, Height=0.5mm, Lead Free="Lead Free", Length=1mm, Max DC Current=900mA, Military Standard=Not, Mount="Surface Mount", Number of Pins=2, Packaging="Tape and Reel", Q Factor=30, Radiation Hardening=No, REACH SVHC="No SVHC", Shielding=Unshielded, Termination=SMD/SMT, Weight=2.8E-05oz, Width=0.5mm
L12 L13: library part CMP-06042-011230-1, "Wire Wound RF Inductor 12nH ±2% 500mA 0.14Ω 0402 (1005)", Case Code (Imperial)=0402, Case Code (Metric)=1005, Current=1A, Current Rating=500mA, DC Resistance (DCR)=140mR, Inductance=12nH, Inductance Tolerance=2%, Max Operating Temperature=125°C, Min Operating Temperature=-55°C, Package Quantity=10000, Resistor Type=Wirewound, Self Resonant Frequency=5.5GHz, Test Frequency=100MHz, Case/Package=0402, Core Material=Non-Magnetic, DC Current=500mA, Depth=0.7mm, Height=0.5mm, Height - Seated (Max)=0.024inch, Lead Free="Lead Free", Length=1mm, Max DC Current=500mA, Military Standard=Not, Mount="Surface Mount", Number of Pins=2, Packaging="Tape and Reel", Radiation Hardening=No, REACH SVHC="No SVHC", Shielding=Unshielded, Termination=SMD/SMT, Tolerance=2%, Weight=2.8E-05oz, Width=0.02inch
L14: library part CMP-03913-14415882-1, "744901082 Fixed Ind 8.2NH 220MA 1.1 Ohm SMD", Case Code (Imperial)=0402, Case Code (Metric)=1005, Current Rating=220mA, DC Resistance (DCR)=540mΩ, Inductance=8.2nH, Max Operating Temperature=125°C, Min Operating Temperature=-40°C, Self Resonant Frequency=5.5GHz, Test Frequency=500MHz, Tolerance=2%, Case/Package=0402, Composition="Thin Film", Height=320µm, Height - Seated (Max)=406.4µm, Length=1mm, Max DC Current=220mA, Mount="Surface Mount", NexarPartId=14415882, Number of Pins=2, Packaging=Digi-Reel®, Q Factor=13, REACH SVHC=Unknown, RoHS=Compliant, Shielding=Unshielded, Termination=SMD/SMT, Weight=652.039032µg, Width=500µm
L15: library part CMP-06042-008251-1, "Wire Wound RF Inductor 12nH ±5% 1500mA 0.064Ω 0603 (1608)", Case/Package=0603, Current Rating=1.5A, DC Resistance (DCR)=64mR, Max Operating Temperature=125°C, Min Operating Temperature=-55°C, Package Quantity=4000, Resistor Type=Wirewound, Self Resonant Frequency=5GHz, Test Frequency=100MHz, Tolerance=5%, Height - Seated (Max)=0.039inch, Inductance=12nH, Length=0.065inch, Mount="Surface Mount", Packaging="Tape and Reel", Shielding=Unshielded, Width=0.035inch
PTH1 PTH2: "Plated through-hole for mounting, default M3"
R1: library part CMP-2002-03927-1, Manufacturer="KOA Speer", Part Number=RK73H1ETTP5602F
R2: library part CMP-2002-07917-1, Manufacturer="Yageo / Phycomp", Part Number=RC0402JR-0710RL
R3: library part CMP-2002-07009-1, Manufacturer="Yageo / Phycomp", Part Number=RC0402FR-07300RL
R4: library part CMP-2002-08060-1, Manufacturer="Yageo / Phycomp", Part Number=RC0402JR-130RL
R5: library part CMP-2002-07382-1, Manufacturer="Yageo / Phycomp", Part Number=RC0402FR-07130RL
R6: library part CMP-03412-026708-2, "RES 820Ω ±1% 0.063W 0402", Case Code (Imperial)=0402, Case Code (Metric)=1005, Max Operating Temperature=155°C, Max Power Dissipation=63mW, Min Operating Temperature=-55°C, Power Rating=62.5mW, Resistance=820R, Resistor Type="Thick Film", Temperature Coefficient=100ppm/°C, Tolerance=1%, Voltage Rating=50V, Case/Package=0402, Features="Moisture Resistant", Height=0.015inch, Length=0.039inch, Number of Terminations=2, Packaging="Tape and Reel", RoHS Compliant=Yes, Series=AC, Termination=SMD/SMT, Weight=2.3E-05oz, Width=0.5mm
R9: library part CMP-2002-07808-1, Manufacturer="Yageo / Phycomp", Part Number=RC0402FR-077R5L
R11 R12: library part CMP-2002-03043-1, Manufacturer="Vishay Dale", Part Number=CRCW040210K0FKEDHP
U1 U4: library part CMP-2000-05298-1, "IC RF Switch SPDT, 50 Ohm, 6-Pin SC70, RoHS, Tape and Reel", Frequency - Lower=10MHz, Frequency - Upper=3GHz, Insertion Loss @ Frequency=0.5dB@2GHz, Isolation @ Frequency=20dB@2GHz(typ), Manufacturer="Peregrine Semiconductor", Operating Temperature=-40degC~85degC, Package / Case=6-TSSOP,SC-88,SOT-363, Package Description="6-Pin Small Outline Transistor, Body 2.05 x 1.25 mm, Pitch 0.65 mm", Package Reference=SC-70-6, Standard Package=3,000, Voltage - Supply=1.8V~3.3V, Category=RF/IFandRFID, Circuit=SPDT, Datasheet URL=https://datasheet.ciiva.com/15100/getdatasheetpartid-685660-15100501.pdf, Datasheet Version=Jan-11, Family=RFSwitches, Features=Single/DualLineControl, IIP3=55dBm(typ), Impedance=50Ohm, Manufacturer URL=http://www.psemi.com/, Online Catalog=PE4259, Other Names=1046-1011-24259-63-ND425963PE4259PE4259SCBC-ZPE4259SCBC-Z-ND, P1dB=29dBm(typ)IP1dB, Packaging=Tape&Reel(TR), RF Type=GeneralPurpose, Series=UltraCMOS, Supplier Device Package=SC-70-6, Topology=Reflective
U2 U3: "No Description Available", Mfr_Name="Texas Instruments", RefDes=RefDes, Type=Type
U6: library part CMP-231850-000003-1, "Amplifier, LNA, 0.05- 2.0 GHz, 19.8 dB, 20 dBm, 0.45 dB NF, 2x2 mm"
Y: "40MHz Â±10ppm Crystal 10pF 50 Ohms 4-SMD, No Lead", Package="SMD-4 NDK America, Inc.", Availability=Unavailable, MF="NDK America, Inc.", MP=NX3225SA-40M-EXS00A-CS03880, Price=None, SnapEDA_Link=https://www.snapeda.com/parts/NX3225SA-40M-EXS00A-CS03880/NDK%20America,%20Inc./view-part/3118804/?ref=snap

## Via types
v1: diameter 20, hole 10, Top Layer to Bottom Layer, tented both sides, 58 vias
v2: diameter 21.81, hole 10, Top Layer to Bottom Layer, 3 vias

## Nets (pads, with @x,y where several pads share a name; then routed paths per layer and width w, separated by ;. In a path a pad name is that pad's centre, name@x,y a point inside that pad or via, vN(x,y) a via of type N, cw(c..) or ccw(c..) an arc to the next point about the centre after c; other vN are vias at no path point)
3V3A: J1.11 L7.2 U3.1 U3.3 | length 534.4
  Top Layer w20.2: 0,-570 0,-590.65 22.7,-613.35 U3.1@60.1,-613.35 ; U3.1 60.3,-622.6 60.3,-639.87 80.15,-659.72 123.17,-659.72 135,-647.89 U3.3 385.02,-622.5 J1.11
CSN: J1.10 U2.11 | length 980.8
  Top Layer w10: U2.11 100.39,-33.96 136.83,-33.96 230,-127.13 249.73,-146.85 516.16,-146.85 603.74,-234.43 603.74,-493.74 J1.10
DCPL_XOSC: C14.1 U2.29 | length 201.1
  Top Layer w10: C14.1 -259.25,-98.03 -256.38,-95.16 -248.49,-95.16 -167.09,-13.76 U2.29
GND: C1.2 C2.2 C3.2 C4.2 C5.2 C6.2 C7.2 C8.2 C9.2 C10.2 C11.2 C13.2 C14.2 C15.1 C16.2 C17.1 C18.1 C20.1 C24.1 C26.1 C27.1 C29.2 C32.2 C33.2 C34.2 C35.2 C36.1 C37.2 C38.2 C39.2 J1.9 J1.12 L2.1 L14.1 PTH1.1 PTH2.1 R1.2 R3.2 R12.1 U1.2 U2.32 U2.33 U3.2 U4.2 U5.2 U5.5 U5.6 U5.7 U5.8 U5.11 U5.13 U5.15 U5.16 U5.17 U6.1 U6.3 U6.4 U6.5 U6.8 U6.9 Y.2 Y.4 | length 566.4
  Top Layer w10: Y.2 v1(-210,-160) ; v1(-190,240) -189.63,240.37 -155.37,240.37 C2.2 v1(-155,270) ; v1(-115,-100) -115,-97.29 -106.73,-89.02 -106.73,-73.34 -106.22,-72.83 U2.32 ; L2.1@74,298.62 v1(74,326) ; C9.2@255.86,-79.89 C9.2 v1(290,-80) ; C6.2 v1@285,-25 ; R1.2 v1(295,10)
  Top Layer w15.05: C15.1 v1(-115,305) ; C20.1 v1(-70,342.68) ; v1(180,80) 181.34,80 184.59,76.75 C5.2 245.41,76.75 248.66,80 v1(250,80) ; C24.1 v1(405,440) ; C26.1 v1(425,215) ; v1(390,125) 389.29,125.71 C27.1 v1(430,165)
  other v1: 100,-570 -240,-385 125,-385 -275,-345 120,-292.87 -330,-270 -105,-260 -365,-230 -80,-220 -290,-135 -325,-100 295,-25 -290,-15 -290,20 -285,100 -285,140
  other v2: 1550,-805.2 1550,-780 1550,-754.8
GPIO0: J1.8 U2.10 | length 864.3
  Top Layer w10: U2.10 100.39,-53.65 128.93,-53.65 240.01,-164.73 508.76,-164.73 585.86,-241.83 585.86,-432.88 J1.8
GPIO2: J1.5 U2.4 | length 668.4
  Top Layer w10: v1(-25,-220) -25,-219.84 -7.4,-202.24 U2.4
  Bottom Layer w10: v1(-25,-220) 5,-250 248.74,-250 J1.5
GPIO3: J1.3 U2.3 | length 608.5
  Top Layer w10: v1(-34.25,-165) -32.34,-163.09 -32.34,-147.62 -27.09,-142.36 U2.3
  Bottom Layer w10: v1(-34.25,-165) 30.75,-230 307.48,-230 J1.3
LNA_N: C20.2 L1.2 L3.1 U2.20 | length 239.9
  Top Layer w5.17: C20.2 -37.68,272.68 -28.27,263.27 L3.1 -14.83,263.1 -14.83,196.7 8.57,173.3 8.57,110.7 9.36,109.91 9.36,96.45 U2.20
LNA_P: C19.2 L1.1 L2.2 U2.19 | length 226.6
  Top Layer w5.17: U2.19 29.04,96.45 29.04,109.91 28.25,110.7 28.25,172.06 16.73,183.58 L1.1 16.73,249.24 19.76,252.27 20.38,252.27 30,261.89 C19.2 74.41,262.68 L2.2
LNA_Shutdown: R11.2
MISO: J1.6 U2.9 | length 747.7
  Top Layer w10: U2.9 100.13,-73.08 123.08,-73.08 232.6,-182.6 501.35,-182.6 567.99,-249.24 567.99,-372.01 J1.6
MOSI: J1.2 U2.7 | length 558
  Top Layer w10: U2.7 51.65,-151.38 102.87,-202.6 102.87,-202.87 118.35,-218.35 453.31,-218.35 J1.2
NetC10_1: C10.1 C29.1 L10.2 R4.1 R5.2
NetC12_1: C12.1 U2.23 | length 159.5
  Top Layer w10: C12.1@-155.48,155 -65,155 -47.28,137.28 -47.28,94.04 U2.23
NetC12_2: C12.2 U2.24 | length 113.6
  Top Layer w10: C12.2@-162.29,115 -72.82,115 -66.97,109.14 -66.97,94.04 U2.24
NetC13_1: C13.1 U2.26 | length 140.5
  Top Layer w10: -220,78.03 -187.28,45.31 U2.26 ; C13.1@-220,88.03 C13.1@-220,90
NetC15_2: C15.2 U2.21 | length 211.4
  Top Layer w10: C15.2 -79.65,239.65 -7.4,167.4 U2.21
NetC16_1: C16.1 U2.6 | length 139.3
  Top Layer w10: U2.6 32.48,-101.87 32.48,-172.48 C16.1
NetC17_2: C17.2 U2.31 Y.1 | length 364.3
  Top Layer w10: C17.2@-210,-350.35 Y.1 -170,-250.55 -170,-95 -128.65,-53.65 -95.51,-53.65 U2.31
NetC18_2: C18.2 U2.30 Y.3 | length 321
  Top Layer w10: C18.2@-330,-200 Y.3 -276.93,-171.65 -138.73,-33.45 -96.02,-33.45 -95.51,-33.96 U2.30
NetC19_1: C19.1 L3.2 L4.2 | length 154.2
  Top Layer w5.17: L3.2 C19.1@30,296.73 ; C19.1 30,350 50,370 L4.2
NetC21_2: C21.2 C22.2 L5.1 L8.2 | length 234.4
  Top Layer w15.05: C21.2 190.08,370 196.73,363.35 196.73,354.99 C22.2 ccw(c190.5,361.21) 290,361.21 L5.1
NetC22_1: C22.1 C23.2 L8.1 | length 137.3
  Top Layer w15.05: C23.2@172.65,202.65 232.29,262.29 232.29,274.05 L8.1
NetC24_2: C24.2 L5.2 L6.1 | length 189.4
  Top Layer w15.05: L6.1@234.33,570.67 260.75,544.24 cw(c190,473.58) 290,473.58 L5.2 294.64,441.73 296.37,440 C24.2@331,440
NetC25_2: C25.2 L9.1 R2.2 | length 160.3
  Top Layer w10: L9.1 146.01,127.34 148.68,127.34 152.86,123.17 256.44,123.17 R2.2@257.28,124.02 ; C25.2 255.71,127.56 R2.2
NetC28_1: C28.1 R3.1
NetC28_2: C28.2 U5.14
NetC30_1: C30.1 C36.2 L11.2
NetC30_2: C30.2 C32.1 L12.1
NetC31_1: C31.1 L14.2
NetC31_2: C31.2 R9.1
NetC33_1: C33.1 L12.2 L13.1
NetC34_1: C34.1 L13.2 U4.1
NetC35_1: C35.1 R9.2 U5.3 U5.4
NetC37_1: C37.1 L10.1 L11.1 U5.9 U5.10
NetC40_1: C40.1 L15.1 U6.7
NetC40_2: C40.2 U1.3
NetC41_1: C41.1
NetC41_2: C41.2 U6.2
NetJ2_1: U4.5
NetR1_1: R1.1 U2.14 | length 133.1
  Top Layer w10: U2.14 173.16,25.62 188.78,10 R1.1
NetR5_1: R5.1 U5.12
NetR6_1: R6.1 U5.1
NetR7_1: U1.1
NetR7_2: 
NetR11_1: R11.1 R12.2 U6.6
NetU4_3: U4.3
PA: C23.1 L9.2 U2.17 | length 111.7
  Top Layer w15.05: U2.17@74.56,104.56 C23.1@146.67,176.67 ; C23.1@145,171.17 148.59,174.75 148.59,178.59 C23.1
RESET: J1.7 U2.2 | length 763.2
  Top Layer w10: v1(-65,-155) -46.77,-136.77 U2.2
  Bottom Layer w10: v1(-65,-155) -65,-185.03 -57.13,-192.9 -57.13,-220.22 -7.35,-270 235,-270 375,-410 375,-455 J1.7
RF_TxRx: L6.2 U1.5 | length 480.6
  Top Layer w15.05: -244.72,664.72 104.45,664.72 cw(c104.45,580.76) 163.83,640.13 L6.2@210.15,593.81
SCLK: J1.4 U2.8 | length 679.5
  Top Layer w10: U2.8 71.85,-101.87 71.85,-141.85 130.48,-200.48 493.95,-200.48 550.11,-256.64 550.11,-311.15 J1.4
TRX_SW: C21.1 L4.1 U2.18 | length 329.6
  Top Layer w10: U2.18 51.65,196.65 111.73,256.73 111.73,365 C21.1@145,365
V_enable: R6.2
VDD_REG: C1.1 C2.1 C3.1 C4.1 C5.1 C6.1 C7.1 C8.1 C9.1 C11.1 C25.1 C26.2 C27.2 C38.1 C39.1 J1.1 L7.1 L15.2 R2.1 R4.2 U2.1 U2.5 U2.12 U2.13 U2.15 U2.22 U2.25 U2.27 U2.28 U3.5 | length 2067
  Top Layer w10: v1(-280,60) -227.98,60 -222.13,54.14 -222.13,31.37 -216.38,25.62 U2.27 U2.27@-95.62,25 ; v1(-277,-58) -239.97,-58 -222.13,-40.16 -222.13,-34.84 -221.91,-34.63 C3.1@-216.59,-34.63 ; v1(-275,175) -230.86,175 -220,164.14 -220,150.75 C4.1 -219.25,125.75 -208.97,115.46 -208.79,115.46 -198.5,105.18 -198.5,105 -158.5,65 U2.25 ; C3.1 -219.25,-17.28 -196.04,5.93 U2.28 ; v1(-190,205) -187.29,205 -184.16,208.13 -158.09,208.13 C2.1@-157.34,208.88 ; C2.1@-152.78,210 -80.75,210 -27.09,156.34 U2.22 ; v1(-130,-240) -130,-200 -120,-190 C7.1 -105,-151.12 -66.46,-112.58 U2.1 ; U2.5 12.79,-101.87 12.79,-117.03 13.58,-117.83 13.58,-193.58 55,-235 55,-334.06 C11.1 ; U2.12 153.76,-13.76 217.54,-77.54 C9.1@224.25,-77.54 ; U2.13 167.57,5.93 198.5,-25 C6.1 228.5,-26.97 231.38,-29.84 231.38,-35.17 244.52,-48.31 v1(244.52,-51.02) ; U2.15 100.39,45.82 C5.1@213.13,45.82 ; C5.1@215.87,45.13 259.87,45.13 v1(260,45) ; C9.1 227.13,-82.87 227.13,-87.13 235,-95 235,-95.17 248.38,-108.55 v1(250.78,-108.55) ; v1(293.7,90) 292.72,90.98 292.72,124.02 R2.1 294.29,127.56 C25.1 C25.1@295,164.29 ; C25.1@295,165 C27.2 352.68,166.97 352.68,213.03 C26.2
  Top Layer w20.2: L7.1 L7.1@0.25,-514.75 ; C11.1 C11.1@60.57,-339.62
  other v1: -15,-460 15,-460 45,-460 75,-460 0,-430 30,-430 60,-430 -15,-400 15,-400 45,-400 75,-400 0,-370 30,-370 -15,-340 15,-340
pads on no net: U1.4 U1.6 U2.16 U2.V U3.4 U4.4 U4.6

## Polygon pours and split planes (outlines as drawn)
GND on Top Layer "NONET_L01_P013" (solid, shelved, pour order 13): -500,900 760,900 760,-830 -500,-830
VDD_REG on Top Layer "NONET_L01_P001" (solid, shelved, pour order 1): 95,-525 -25,-525 -45,-525 -45,-495 -45,-305 95,-305
VDD_REG on Layer 3 "NONET_L03_P011" (solid, shelved, pour order 11): -350,200 440,200 440,-490 -350,-490
GND on Layer 3 "NONET_L03_P016" (solid, shelved, pour order 16): -500,900 760,900 760,-830 -500,-830
GND on Bottom Layer "NONET_L04_P014" (solid, shelved, pour order 14): -500,900 760,900 760,-830 -500,-830
GND on Layer 2 "NONET_L02_P015" (solid, shelved, pour order 15): -500,900 -500,-830 760,-830 760,900

## Keep-outs
Top Layer:
  rectangle: -290,-255 -200,-235

## Other copper
Top Layer:
  pour cut-out: -75,75 -75,-80 80,-80 80,75

## Silkscreen, mask and mechanical layers (free items; w line width, h text height)
Top Overlay:
  lines w7.87: 140,215 180,215
  text "VReg" at 225,-276.67 h25
  text "MOSI" at 625,-295 h25
  text "GPIO3" at 205,-365 h25
  text "SCLK" at 615,-375 h25
  text "GPIO2" at 205,-445 h25
  text "MISO" at 625,-445 h25
  text "Reset" at 205,-525 h25
  text "GPIO0" at 615,-525 h20
  text "GND" at 225,-605 h25
  text "CSN" at 625,-605 h25
  text "3V3" at 225,-685 h25
  text "GND" at 625,-685 h25
Board Layer Stack Bottom Overlay:
  text "UVSD 2025" at 540,-125 h30 r270
  text "Maya Winland-Gaetz" at 600,-125 h30 r270
  text "CC1201 Eval Board" at 650,-125 h40 r270

## Text inside footprints (layer, text, board x,y; h text height)
U2: Mechanical 13 "*" at -51.3,-87.12 h50 r90; Top Overlay "*" at -130,-155 h50 r90
U3: Mechanical 13 "*" at 83.2,-605.75 h50 r90; Top Overlay "*" at 32,-670 h50 r90